# EAGLE board skypic (EAGLE 4.09)
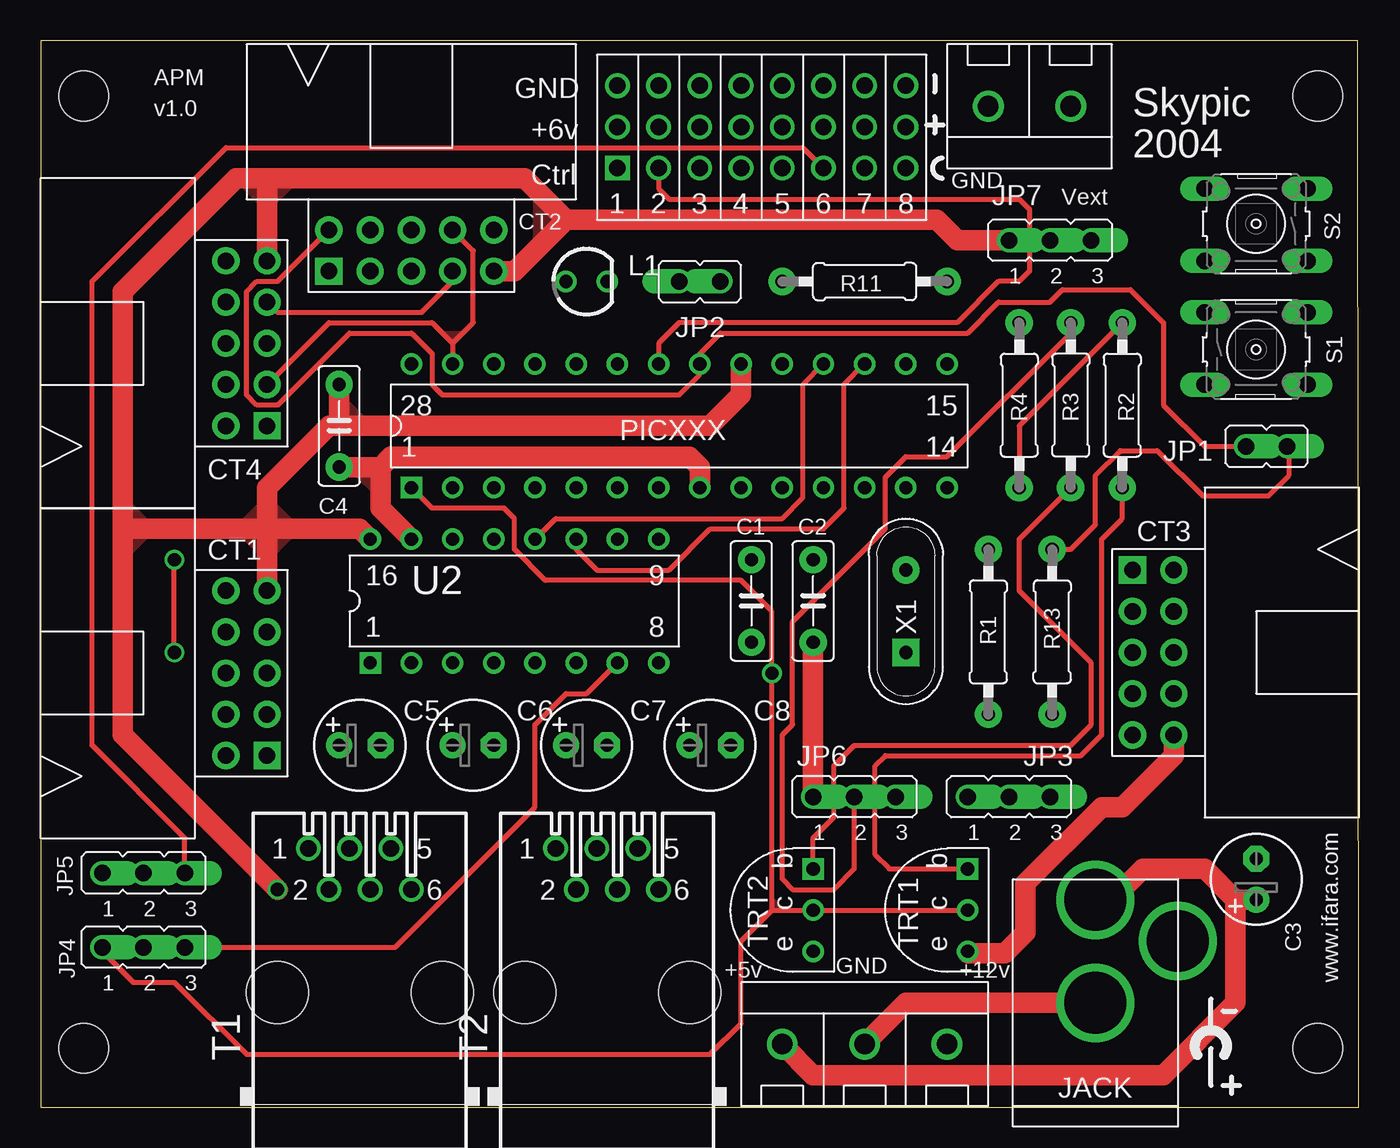
[diagram p0: board, top side]
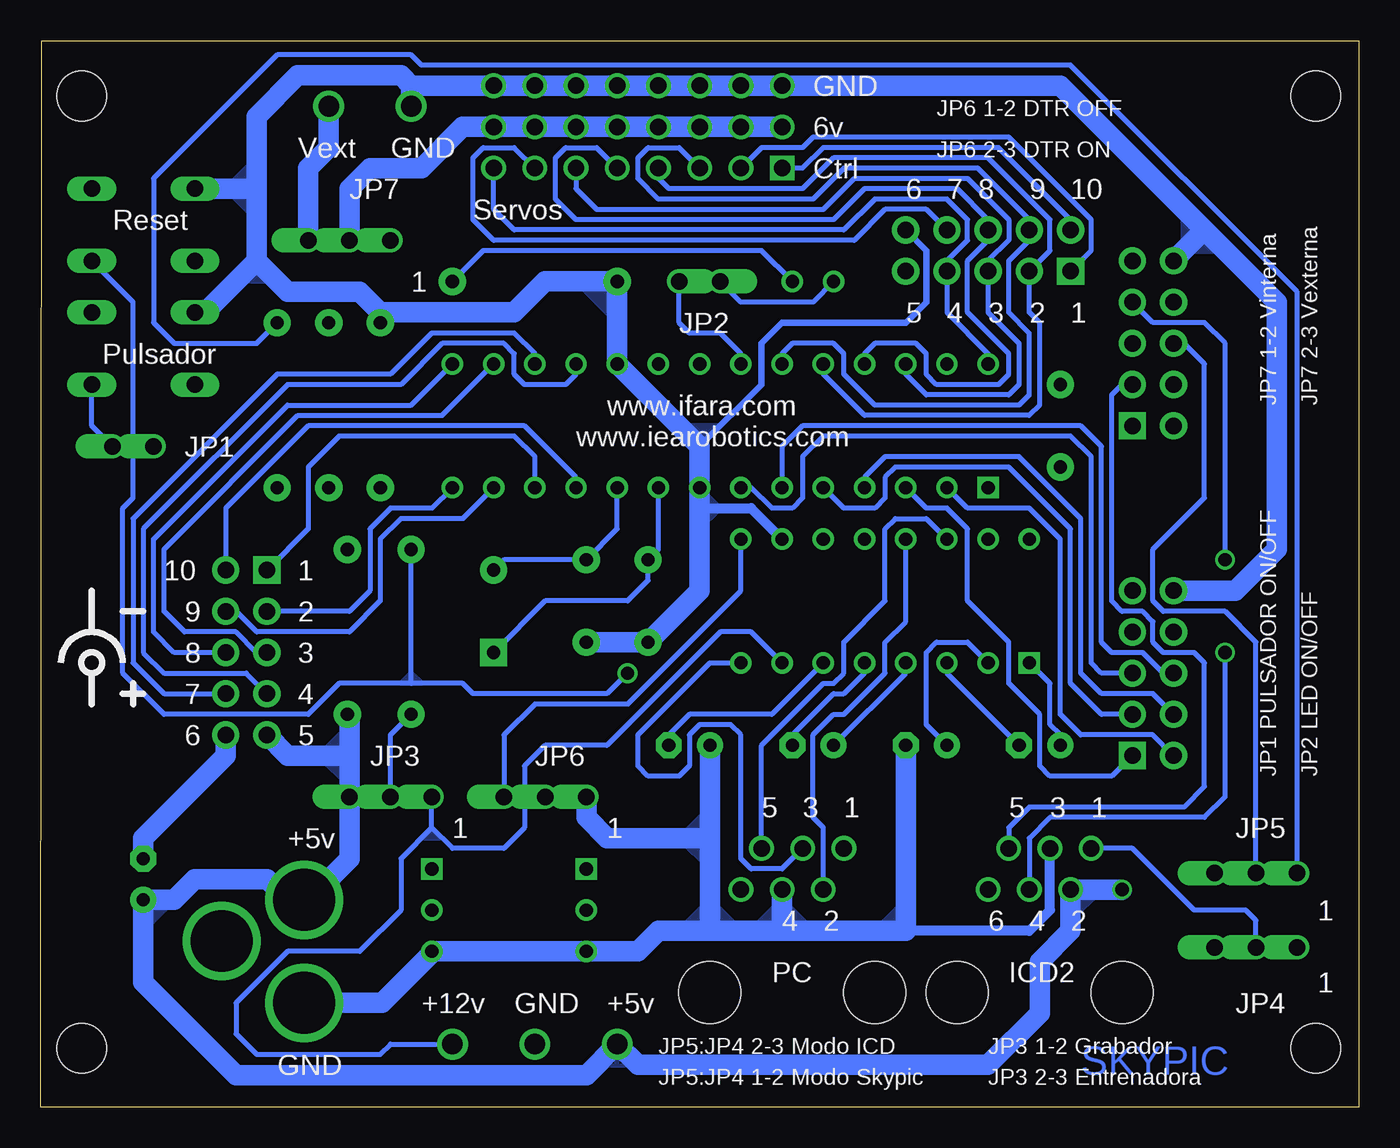
[diagram p1: board, bottom side, seen from below]

Size 81.26 x 65.73 mm. Coordinates in mm from the lower left corner, seen from the top.
Outline: 0,0 81.26,0 81.19,65.73 0,65.71 0,0
Copper layers used: Top, bottom
Holes 3.05 mm at 2.66,3.65 2.66,62.32 78.73,62.32 78.73,3.65

## Footprints (pad centres in the part's own frame; a part is rotated, then mirrored left to right if it is on the bottom)
C5 = drill 0.813 pad 1.676 round: 1 0,0; 2 5.08,0
E2,5-6 = drill 0.813 pad 1.6 round: + -1.27,0 | drill 0.813 pad 1.6 octagon: - 1.27,0
CTCON = drill 1.016 pad 1.676 square: 1 0,0 | drill 1.016 pad 1.676 round: 2 2.54,0; 3 5.08,0; 4 7.62,0; 5 10.16,0; 6 10.16,2.54; 7 7.62,2.54; 8 5.08,2.54; 9 2.54,2.54; 10 0,2.54
C3P = drill 1.27 pad 1.676 round: 1 0,0; 2 5.08,0; 3 10.16,0
C2P = drill 1.27 pad 1.676 round: 1 0,0; 2 5.08,0
JACK = drill 3.81 round: 1 0,-7.62; 2 5.08,-3.81; 3 0,-1.27
JP2 = drill 1.016 offset: 1 0,0; 2 2.54,0
JP3R = drill 1.016 offset: 1 0,0; 2 2.54,0; 3 5.08,0
LED3MM = drill 0.813 round: A 0,0; K 2.54,0
DIL28 = drill 0.813 square: 1 0,0 | drill 0.813 round: 2 2.54,0; 3 5.08,0; 4 7.62,0; 5 10.16,0; 6 12.7,0; 7 15.24,0; 8 17.78,0; 9 20.32,0; 10 22.86,0; 11 25.4,0; 12 27.94,0; 13 30.48,0; 14 33.02,0; 15 33.02,7.62; 16 30.48,7.62; 17 27.94,7.62; 18 25.4,7.62; 19 22.86,7.62; 20 20.32,7.62; 21 17.78,7.62; 22 15.24,7.62; 23 12.7,7.62; 24 10.16,7.62; 25 7.62,7.62; 26 5.08,7.62; 27 2.54,7.62; 28 0,7.62
R207/10 = drill 0.813 pad 1.676 round: 1 0,0; 2 10.16,0
PULSADOR-PEQUEÑO = drill 1.016 long: 1 0,0; 2 6.35,0; 3 0,-4.445; 4 6.35,-4.445
RJ11A = drill 1.016 round: 1 0,0; 2 -1.27,2.54; 3 -2.54,0; 4 -3.81,2.54; 5 -5.08,0; 6 -6.35,2.54 | hole 3.81: 1.905,8.89; -8.255,8.89
TRT-NPN = drill 0.813 square: B 1.27,-1.27 | drill 0.813 round: C -1.27,-1.27; E -3.81,-1.27
DIL16 = drill 0.813 square: 1 0,0 | drill 0.813 round: 2 2.54,0; 3 5.08,0; 4 7.62,0; 5 10.16,0; 6 12.7,0; 7 15.24,0; 8 17.78,0; 9 17.78,7.62; 10 15.24,7.62; 11 12.7,7.62; 12 10.16,7.62; 13 7.62,7.62; 14 5.08,7.62; 15 2.54,7.62; 16 0,7.62
PAD8X3 = drill 1.016 square: 1 0,0 | drill 1.016 round: 2 2.54,0; 3 5.08,0; 4 7.62,0; 5 10.16,0; 6 12.7,0; 7 15.24,0; 8 17.78,0; 9 0,2.54; 10 2.54,2.54; 11 5.08,2.54; 12 7.62,2.54; 13 10.16,2.54; 14 12.7,2.54; 15 15.24,2.54; 16 17.78,2.54; 17 0,5.08; 18 2.54,5.08; 19 5.08,5.08; 20 7.62,5.08; 21 10.16,5.08; 22 12.7,5.08; 23 15.24,5.08; 24 17.78,5.08
XTAL-R = drill 0.813 pad 1.676 square: 1 0,0 | drill 0.813 pad 1.676 round: 2 5.08,0

## Placement (x,y rotation side)
C1  22pF  [C5]  43.81,28.66 90 top
C2  22pF  [C5]  47.62,28.66 90 top
C3  1uF  [E2,5-6]  74.93,14.06 90 top
C4  100n  [C5]  18.41,39.46 90 top
C5  [E2,5-6]  19.68,22.31 0 top
C6  [E2,5-6]  26.67,22.31 0 top
C7  [E2,5-6]  33.65,22.31 0 top
C8  [E2,5-6]  41.27,22.31 0 top
CT1  Puerto A  [CTCON]  13.96,21.68 90 top
CT2  Puerto B  [CTCON]  17.78,51.52 0 top
CT3  Puerto C  [CTCON]  67.31,33.11 270 top
CT4  Prog  [CTCON]  13.96,42 90 top
CT5  Power  [C3P]  45.71,3.9 0 top
CT6  Servos  [C2P]  63.49,61.68 180 top
JACK  Hembra  [JACK]  65.02,14.06 0 top
JP1  RB0  [JP2]  74.29,40.73 0 top
JP2  RB5  [JP2]  41.9,50.89 180 top
JP3  Prog  [JP3R]  57.14,19.14 0 top
JP4  SKY/ICD  [JP3R]  3.81,9.87 0 top
JP5  [JP3R]  3.81,14.44 0 top
JP6  DTR  [JP3R]  47.62,19.14 0 top
JP7  SV5  [JP3R]  59.68,53.43 0 top
L1  LED  [LED3MM]  32.38,50.89 0 top
PICXXX  PIC  [DIL28]  22.86,38.19 0 top
R1  10K  [R207/10]  58.41,34.38 270 top
R2  10K  [R207/10]  66.67,48.35 270 top
R3  10k  [R207/10]  63.49,38.19 90 top
R4  4K7  [R207/10]  60.32,48.35 270 top
R11  330  [R207/10]  45.71,50.89 0 top
R13  4K7  [R207/10]  62.35,34.38 270 top
S1  Pulsador  [PULSADOR-PEQUEÑO]  71.75,48.98 0 top
S2  Reset  [PULSADOR-PEQUEÑO]  78.1,52.16 180 top
T1  ICD2  [RJ11A]  16.51,15.96 180 top
T2  PC  [RJ11A]  31.75,15.96 180 top
TRT1  SC107  [TRT-NPN]  55.88,13.42 90 top
TRT2  SC107  [TRT-NPN]  46.35,13.42 90 top
U2  MAX232  [DIL16]  20.32,27.39 0 top
U$24  SERVOS8  [PAD8X3]  35.55,57.87 0 top
X1  4Mhz  [XTAL-R]  53.34,28.03 90 top

## Library data of the parts
C1 C2 C4 CT1-CT6 JACK JP1-JP7 L1 PICXXX R1-R4 R11 R13 S1 S2 T1 T2 TRT1 TRT2 U2 U$24 X1 = custom-2002
C3 C5-C8 = rcl

## Nets
+12V: CT5.3 JP3.1 JP4.3 U2.7
A0: CT1.10 PICXXX.2
A1: CT1.1 PICXXX.3
A2: CT1.9 PICXXX.4
A3: CT1.2 PICXXX.5
A4: CT1.8 PICXXX.6
A5: CT1.3 PICXXX.7
B0: CT2.10 JP1.1 PICXXX.21 U$24.1
B1: CT2.1 JP2.1 PICXXX.22 U$24.2
B2: CT2.9 PICXXX.23 U$24.3
B3: CT2.2 PICXXX.24 U$24.4
B4: CT2.8 PICXXX.25 U$24.5
B5: CT2.3 JP5.3 PICXXX.26 U$24.6
B6: CT2.7 CT4.2 PICXXX.27 T1.5 U$24.7
B7: CT2.4 CT4.4 PICXXX.28 T1.4 U$24.8
C0: CT3.10 PICXXX.11
C1: CT3.1 PICXXX.12
C2: CT3.9 PICXXX.13
C3: CT3.2 PICXXX.14
C4: CT3.8 PICXXX.15
C5: CT3.3 PICXXX.16
C6: CT3.7 PICXXX.17 U2.11
C7: CT3.4 PICXXX.18 U2.12
DTR: T2.3 U2.8
GND: C1.1 C2.1 C3.- C4.1 C6.- C8.+ CT1.6 CT2.6 CT3.6 CT4.6 CT5.2 CT6.2 JACK.1 JP6.1 PICXXX.8 PICXXX.19 R4.1 R11.1 S1.1 S2.4 T1.3 T2.4 TRT1.E TRT2.E U2.10 U2.15 U$24.17
N$1: C2.2 PICXXX.10 X1.2
N$3: C1.2 PICXXX.9 X1.1
N$4: JP1.2 R13.1 S1.4
N$5: JP6.3 U2.9
N$6: JP2.2 L1.A
N$8: JP3.2 R1.2
N$9: JP4.2 T1.1
N$10: R2.2 TRT1.B
N$11: JP5.1 R2.1 R4.2
N$13: C5.- U2.3
N$14: C7.+ U2.4
N$15: C5.+ U2.1
N$16: C7.- U2.5
N$18: C6.+ U2.2
N$19: C8.- U2.6
N$20: R3.1 TRT2.B
N$21: JP6.2 R3.2
N$23: L1.K R11.2
N$24: JP4.1 PICXXX.1 R1.1 S2.1 TRT1.C TRT2.C
N$25: CT6.1 JP7.3
N$27: JP7.2 U$24.9
PA4: CT4.8 JP5.2
RXPC: T2.5 U2.14
TXPC: T2.2 U2.13
VCC: C3.+ C4.2 CT1.5 CT2.5 CT3.5 CT4.5 CT5.1 JACK.3 JP3.3 JP7.1 PICXXX.20 R13.2 T1.2 U2.16

## Tracks (layer width: path | path; a pad name or v marks a point on that pad's centre or on a via)
+12V
  Top 0.305: JP4.3 21.84,9.87 30.48,18.5 30.48,23.58 32.38,25.49 33.65,25.49 U2.7
  bottom 0.305: U2.7 37.46,29.3 39.36,29.3 46.35,22.31 50.16,22.31 51.43,21.04 51.43,17.23 52.7,15.96 55.88,15.96 57.14,17.23 | CT5.3 59.68,3.9 60.32,3.26 67.94,3.26 69.21,4.53 69.21,6.44 66.04,9.61 61.59,9.61 59.05,12.15 59.05,15.33 57.14,17.23 | 57.14,17.23 JP3.1
  pour bottom: 57.14,17.23 56.51,16.6 57.78,16.6
A0
  bottom 0.305: CT1.10 12.69,22.95 17.14,22.95 18.41,24.22 18.41,35.01 20.32,36.92 24.12,36.92 PICXXX.2
A1
  bottom 0.305: CT1.1 15.23,20.41 19.05,20.41 19.68,21.04 19.68,24.22 21.59,26.12 21.59,28.66 24.12,31.2 24.12,35.65 25.39,36.92 26.67,36.92 PICXXX.3
A2
  bottom 0.305: CT1.9 12.69,25.49 15.87,25.49 17.14,26.76 17.14,36.28 20.95,40.09 29.21,40.09 30.48,38.82 PICXXX.4
A3
  bottom 0.305: CT1.2 15.87,24.22 17.78,26.12 17.78,35.65 21.59,39.46 28.57,39.46 29.21,38.82 29.21,37.55 29.84,36.92 31.75,36.92 PICXXX.5
A4
  bottom 0.305: CT1.8 12.06,26.76 13.33,28.03 15.23,28.03 15.87,28.66 15.87,40.73 17.14,42 34.28,42 35.55,40.73 PICXXX.6
A5
  bottom 0.305: CT1.3 15.87,26.76 16.51,27.39 16.51,40.09 17.78,41.36 33.02,41.36 34.28,40.09 34.28,37.55 34.92,36.92 36.19,36.92 37.46,38.19 PICXXX.7
B0
  Top 0.305: CT2.10 14.6,50.89 13.33,50.89 12.69,50.25 12.69,43.9 13.33,43.27 14.6,43.27 19.05,47.71 22.86,47.71 24.12,46.44 24.12,44.54 24.76,43.9 39.36,43.9 40.63,45.17 PICXXX.21 40.63,46.44 41.9,47.71 57.14,47.71 59.05,49.62 62.22,49.62 62.99,50.38 67.18,50.38 69.21,48.35 69.21,43.27 71.75,40.73 JP1.1
  bottom 0.305: CT2.10 17.78,54.7 22.22,59.14 33.02,59.14 34.28,57.87 U$24.1
B1
  Top 0.305: PICXXX.22 38.09,47.08 39.36,48.35 56.51,48.35 59.05,50.89 60.32,50.89 60.95,51.52 60.95,55.33 60.32,55.97 38.73,55.97 38.09,56.6 U$24.2
  bottom 0.305: CT2.1 16.51,52.79 16.51,54.7 21.59,59.78 33.65,59.78 34.28,59.14 36.82,59.14 U$24.2 | JP2.1 41.9,48.35 41.27,47.71 39.36,47.71 38.09,46.44 PICXXX.22
B2
  bottom 0.305: PICXXX.23 35.55,46.44 34.92,47.08 32.38,47.08 31.75,46.44 31.75,45.17 29.84,43.27 20.95,43.27 20.32,43.9 20.32,47.71 21.59,48.98 21.59,52.16 20.32,53.43 CT2.9 20.32,54.7 23.49,57.87 31.75,57.87 33.65,55.97 43.17,55.97 44.45,57.24 44.45,58.51 43.81,59.14 41.9,59.14 U$24.3
B3
  bottom 0.305: PICXXX.24 33.02,45.17 30.48,42.63 20.32,42.63 19.68,43.27 19.68,48.35 20.32,48.98 CT2.2 19.05,52.79 19.05,54.7 22.86,58.51 32.38,58.51 34.28,56.6 42.54,56.6 43.17,57.24 U$24.4
B4
  bottom 0.305: PICXXX.25 30.48,46.44 29.84,47.08 27.3,47.08 26.67,46.44 26.67,45.17 26.03,44.54 22.22,44.54 21.59,45.17 21.59,46.44 24.12,48.98 24.12,52.16 22.86,53.43 CT2.8 22.86,54.7 24.76,56.6 30.48,56.6 32.38,54.7 48.25,54.7 49.52,55.97 49.52,58.51 48.89,59.14 46.98,59.14 U$24.5
B5
  Top 0.305: JP5.3 8.88,16.6 3.17,22.31 3.17,50.89 11.42,59.14 46.98,59.14 U$24.6
  bottom 0.305: PICXXX.26 27.94,45.17 26.67,43.9 21.59,43.9 20.95,44.54 20.95,47.08 22.86,48.98 CT2.3 22.86,52.16 21.59,53.43 21.59,54.7 24.12,57.24 31.11,57.24 33.02,55.33 46.98,55.33 48.25,56.6 U$24.6
B6
  Top 0.305: CT4.2 17.78,48.35 24.12,48.35 25.39,47.08 | CT2.7 26.67,52.79 26.67,48.35 25.39,47.08 | 25.39,47.08 PICXXX.27
  bottom 0.305: CT2.7 26.67,55.33 29.21,55.33 31.11,53.43 53.34,53.43 54.6,54.7 54.6,58.51 53.97,59.14 52.06,59.14 U$24.7 | CT4.2 14.6,44.54 15.23,43.9 15.23,31.2 14.6,30.57 13.33,30.57 12.69,29.93 12.69,28.66 12.06,28.03 10.15,28.03 9.52,27.39 9.52,19.77 10.79,18.5 20.32,18.5 21.59,17.23 T1.5
  pour Top: 25.39,47.08 24.76,47.71 26.03,47.71
B7  (via drill 0.81)
  Top 0.305: CT4.4 14.6,48.98 23.49,48.98 25.39,50.89 CT2.4 | v8.25,28.03 v8.25,33.74
  bottom 0.305: PICXXX.28 22.86,46.44 25.39,48.98 CT2.4 25.39,52.16 24.12,53.43 24.12,54.7 25.39,55.97 29.84,55.97 31.75,54.06 52.06,54.06 53.34,55.33 U$24.8 | v8.25,28.03 8.25,19.14 9.52,17.87 19.05,17.87 20.32,16.6 T1.4 | v8.25,33.74 8.25,47.08 9.52,48.35 12.69,48.35 CT4.4
C0
  bottom 0.305: CT3.10 69.84,36.92 64.77,42 51.43,42 48.25,38.82 PICXXX.11
C1
  bottom 0.305: CT3.1 64.77,35.65 64.77,39.46 62.86,41.36 52.06,41.36 50.79,40.09 PICXXX.12
C2
  bottom 0.305: CT3.9 69.21,30.57 67.94,29.3 62.22,29.3 60.32,31.2 60.32,35.01 59.05,36.28 55.24,36.28 PICXXX.13
C3
  bottom 0.305: CT3.2 62.22,30.57 60.95,31.84 60.95,35.65 59.68,36.92 57.14,36.92 PICXXX.14
C4
  bottom 0.305: CT3.8 73.02,28.03 74.29,29.3 74.29,35.01 66.04,43.27 58.41,43.27 PICXXX.15
C5
  bottom 0.305: CT3.3 67.94,28.03 69.21,29.3 72.39,29.3 73.66,30.57 73.66,34.38 65.4,42.63 56.51,42.63 PICXXX.16
C6
  Top 0.305: U2.11 33.02,34.38 34.28,33.11 38.73,33.11 41.27,35.65 48.25,35.65 49.52,36.92 49.52,44.54 PICXXX.17
  bottom 0.305: CT3.7 73.66,25.49 75.56,27.39 75.56,36.28 66.67,45.17 59.68,45.17 57.14,47.71 52.06,47.71 50.79,46.44 PICXXX.17
C7
  Top 0.305: U2.12 31.75,36.28 45.71,36.28 46.98,37.55 46.98,44.54 PICXXX.18
  bottom 0.305: CT3.4 68.58,26.76 73.66,26.76 74.93,28.03 74.93,35.65 66.04,44.54 59.05,44.54 56.51,47.08 52.7,47.08 52.06,46.44 52.06,45.17 51.43,44.54 48.89,44.54 48.25,45.17 PICXXX.18
DTR
  bottom 0.305: U2.8 40,27.39 44.45,22.95 44.45,21.04 43.81,20.41 41.9,20.41 41.27,21.04 41.27,22.95 40.63,23.58 38.73,23.58 38.09,22.95 38.09,15.33 37.46,14.69 35.55,14.69 T2.3
GND
  Top 1.27: 64.77,6.44 53.34,6.44 CT5.2 | JACK.1 65.4,6.44 | CT3.6 69.84,21.68 66.67,18.5 65.4,18.5 60.7,13.8 60.7,10.76 59.43,9.49 57.14,9.49 TRT1.E | JP6.1 C2.1 | 20.95,39.46 21.59,40.09 40,40.09 40.63,39.46 PICXXX.8 | 20.95,39.46 C4.1 | 20.95,39.46 20.95,36.92 U2.15 | JACK.1 64.77,6.44 | JACK.1 64.77,6.44
  bottom 0.406: CT2.6 26.67,52.79 26.67,49.62 27.94,48.35 35.55,48.35 36.82,47.08 36.82,44.54 40.63,40.73
  bottom 0.61: 27.94,10.88 20.32,10.88 19.05,12.15 T1.3 | U2.10 37.46,36.92 40.63,36.92
  bottom 1.27: 9.52,54.06 5.08,49.62 5.08,34.38 7.62,31.84 CT1.6 | 9.52,54.06 CT4.6 | 9.52,54.06 18.41,62.95 U$24.17 58.41,62.95 | 60.32,48.98 52.06,48.98 50.16,50.89 R11.1 PICXXX.19 40.63,40.73 PICXXX.8 40.63,36.92 40.63,31.84 C1.1 C2.1 | 40,10.88 43.17,10.88 44.45,9.61 TRT2.E 57.02,9.61 57.14,9.49 | 40,10.88 40,16.6 | 40,16.6 C8.+ | C6.- 27.94,10.88 35.55,10.88 | 35.55,10.88 40,10.88 | CT3.6 69.84,21.68 74.93,16.6 C3.- | 60.32,48.98 R4.1 | 60.32,48.98 61.59,50.25 66.04,50.25 67.94,52.16 | 58.41,62.95 59.05,63.59 65.4,63.59 67.94,61.05 67.94,56.6 | S1.1 71.12,48.98 67.94,52.16 | 58.41,62.95 CT6.2 | 35.55,10.88 T2.4 | 40,16.6 46.35,16.6 47.62,17.87 JP6.1 | 67.94,52.16 67.94,56.6 | 67.94,56.6 S2.4 | 57.14,9.49 TRT1.E | JACK.1 60.19,6.44 57.14,9.49
  pour bottom: 8.25,52.79 10.79,52.79 10.79,55.33
  pour bottom: 27.94,10.88 27.94,12.79 29.84,10.88
  pour bottom: 33.65,10.88 37.46,10.88 35.55,12.79
  pour bottom: 38.09,10.88 41.9,10.88 40,12.79
  pour bottom: 67.94,52.16 66.67,50.89 69.21,50.89
  pour bottom: 40.63,40.73 39.36,42 41.9,42
  pour bottom (no thermals): 40.63,38.19 39.36,36.92 40.63,35.65
  pour bottom (no thermals): 48.25,50.89 45.71,50.89 45.71,48.35
  pour Top (no thermals): 20.95,39.46 19.05,39.46 20.95,37.55
  pour bottom: 40,18.5 41.9,16.6 40,14.69
  pour bottom (no thermals): 67.94,56.6 69.84,56.6 67.94,54.7
  pour bottom (no thermals): 67.94,56.6 67.94,58.51 69.84,56.6
N$1
  bottom 0.305: X1.2 52.7,33.74 C2.2 45.71,35.65 PICXXX.10
N$3
  bottom 0.305: X1.1 50.16,31.2 45.08,31.2 43.81,32.47 C1.2 43.17,34.38 PICXXX.9
N$4
  Top 0.305: R13.1 63.49,34.38 65.02,35.9 65.02,38.95 66.54,40.48 68.83,40.48 71.62,37.68 75.69,37.68 76.96,38.95 76.96,40.48 76.83,40.6 JP1.2
  bottom 0.305: S1.4 78.1,42 JP1.2
N$5
  bottom 0.305: U2.9 38.09,31.84 45.08,24.85 50.79,24.85 52.7,22.95 JP6.3
N$6
  bottom 0.305: L1.A 33.65,49.62 38.09,49.62 JP2.2
N$8
  bottom 0.305: R1.2 59.68,22.95 JP3.2
N$9
  bottom 0.305: JP4.2 6.34,11.52 6.98,12.15 10.15,12.15 13.96,15.96 T1.1
N$10
  Top 0.305: R2.2 66.67,36.28 65.4,35.01 65.4,22.95 64.13,21.68 52.06,21.68 51.43,21.04 51.43,15.58 52.32,14.69 TRT1.B 57.14,14.82
N$11
  Top 0.305: R4.2 60.32,42 R2.1
  bottom 0.305: JP5.1 3.81,50.25 17.78,64.22 57.78,64.22 58.41,64.86 66.67,64.86 74.29,57.24 74.29,48.35 73.02,47.08 67.94,47.08 R2.1
N$13
  bottom 0.305: U2.3 25.39,26.76 C5.-
N$14
  bottom 0.305: U2.4 27.94,26.76 C7.+
N$15
  bottom 0.305: C5.+ 18.41,22.95 19.05,23.58 19.05,26.12 U2.1
N$16
  bottom 0.305: U2.5 30.48,26.76 31.75,25.49 32.38,25.49 34.92,22.95 C7.-
N$18
  bottom 0.305: U2.2 24.12,28.66 26.03,28.66 26.67,28.03 26.67,23.58 C6.+
N$19
  bottom 0.305: U2.6 36.19,24.22 41.27,24.22 42.54,22.95 C8.-
N$20
  Top 0.305: TRT2.B 47.62,16.6 48.89,17.87 48.89,21.04 50.16,22.31 63.49,22.31 64.77,23.58 64.77,27.39 60.32,31.84 60.32,35.01 R3.1
N$21
  Top 0.305: JP6.2 50.16,14.69 48.89,13.42 46.35,13.42 45.71,14.06 45.71,22.95 46.35,23.58 46.35,29.93 52.06,35.65 52.06,38.82 53.34,40.09 55.88,40.09 63.49,47.71 R3.2
N$23
  bottom 0.305: R11.2 53.97,52.79 36.82,52.79 L1.K
N$24  (via drill 0.81)
  Top 0.305: JP4.1 3.81,9.61 5.71,7.71 8.25,7.71 12.69,3.26 41.27,3.26 43.17,5.17 43.17,10.25 45.08,12.15 | 45.08,12.15 TRT2.C TRT1.C | 45.08,12.15 v45.08,26.76 45.08,30.57 43.17,32.47 31.11,32.47 29.21,34.38 29.21,36.28 28.57,36.92 24.12,36.92 PICXXX.1
  bottom 0.305: S2.1 75.56,49.62 75.56,37.55 76.2,36.92 76.2,26.76 73.66,24.22 64.77,24.22 62.86,26.12 58.41,26.12 | v45.08,26.76 46.35,25.49 54.6,25.49 55.24,26.12 58.41,26.12 | 58.41,26.12 R1.1
  pour Top: 45.08,12.15 45.08,12.79 45.71,12.15
  pour bottom (no thermals): 57.78,26.12 58.41,26.76 59.05,26.12
N$25
  bottom 1.27: CT6.1 63.49,59.14 64.77,57.87 JP7.3
N$27
  bottom 1.27: JP7.2 62.22,56.6 60.95,57.87 57.78,57.87 55.24,60.41 U$24.9
PA4
  bottom 0.305: CT4.8 10.79,47.08 9.52,45.81 9.52,37.55 12.69,34.38 12.69,31.2 12.06,30.57 8.25,30.57 6.34,28.66 JP5.2
RXPC
  bottom 0.305: U2.14 26.67,36.28 28.57,36.28 29.21,35.65 29.21,31.2 31.75,28.66 31.75,26.76 32.38,26.12 33.02,26.12 36.82,22.31 T2.5
TXPC
  bottom 0.305: U2.13 27.94,29.93 29.21,28.66 29.21,26.76 31.75,24.22 32.38,24.22 33.65,22.95 33.65,17.87 33.02,17.23 T2.2
VCC  (via drill 0.81)
  Top 1.27: 64.77,12.79 66.04,12.79 67.94,14.69 71.75,14.69 73.66,12.79 | 73.66,12.79 73.66,6.44 69.21,1.99 47.62,1.99 CT5.1 | 73.66,12.79 C3.+ | 13.96,57.24 CT4.5 | 32.38,54.7 29.84,57.24 13.96,57.24 | 32.38,54.7 55.24,54.7 56.51,53.43 JP7.1 | 32.38,54.7 29.21,51.52 CT2.5 | 18.41,42 17.78,42 13.96,38.19 13.96,35.65 | 18.41,42 41.27,42 43.17,43.9 PICXXX.20 | CT1.5 13.96,35.65 | 13.96,35.65 19.68,35.65 U2.16 | 13.96,57.24 12.06,57.24 5.08,50.25 5.08,35.65 | v14.6,13.42 5.08,22.95 5.08,35.65 | 18.41,42 C4.2 | 5.08,35.65 13.33,35.65
  bottom 0.61: 64.77,12.79 JACK.3 65.4,12.79 | 62.22,24.22 R13.2
  bottom 1.27: v14.6,13.42 T1.2 17.78,10.88 19.68,8.98 19.68,5.8 22.86,2.63 44.45,2.63 CT5.1 47.62,1.99 69.21,1.99 74.93,7.71 C3.+ 73.02,12.79 71.75,14.06 67.31,14.06 66.04,12.79 65.4,12.79 64.77,12.79 62.22,15.33 JP3.3 62.22,21.68 | 62.22,21.68 62.22,24.22 | 62.22,21.68 66.04,21.68 CT3.5
  pour Top: 32.38,54.7 30.48,56.6 30.48,52.79
  pour Top: 12.06,57.24 13.96,55.33 15.87,57.24
  pour Top: 12.06,35.65 13.96,33.74 15.87,35.65 13.96,37.55
  pour Top: 18.41,43.27 18.41,42 20.32,42 18.41,43.9
  pour bottom (no thermals): 62.22,23.58 64.13,21.68 62.22,19.77
  pour bottom (no thermals): 15.87,13.42 17.78,13.42 17.78,11.52
  pour bottom: 44.45,2.63 45.71,3.9 46.98,2.63
  pour Top (no thermals): 5.08,33.74 6.98,35.65 5.08,35.65
  pour Top (no thermals): 5.08,35.65 5.08,37.55 6.98,35.65
  pour bottom (no thermals): 73.02,12.79 74.93,10.88 74.93,12.79

## Text on the board
bottom: SKYPIC
tPlace: APM | v1.0 | Skypic | 2004 | GND | Vext | +5v | GND | +12v | www.ifara.com
bPlace: GND | JP6 1-2 DTR OFF | 6v | JP6 2-3 DTR ON | GND | Vext | Ctrl | 10 | 9 | 8 | 7 | 6 | JP7 | Servos | Reset | 1 | 1 | 2 | 3 | 4 | 5 | JP2 | Pulsador | JP7 2-3 Vexterna | JP7 1-2 Vinterna | www.ifara.com | www.iearobotics.com | JP1 | 1 | 10 | 2 | 9 | 3 | 8 | 4 | 7 | 5 | 6 | JP6 | JP3 | JP2 LED ON/OFF | JP1 PULSADOR ON/OFF | 1 | 3 | 5 | 1 | 3 | 5 | JP5 | 1 | 1 | +5v | 1 | 2 | 4 | 6 | 2 | 4 | ICD2 | PC | 1 | JP4 | +5v | GND | +12v | JP3 1-2 Grabador | JP5:JP4 2-3 Modo ICD | GND | JP3 2-3 Entrenadora | JP5:JP4 1-2 Modo Skypic